# Altium PCB SuperBot_Pcb.PcbDoc
Units mm, origin at the board's own origin, x right, y up, seen from the top; angles counter-clockwise.
Board outline 80 x 92 mm, 2 copper layers (Top Layer, Bottom Layer); 130 components, 142 nets, 552 pads, 15 vias.
Unrouted connection lines stored in the file: 209.
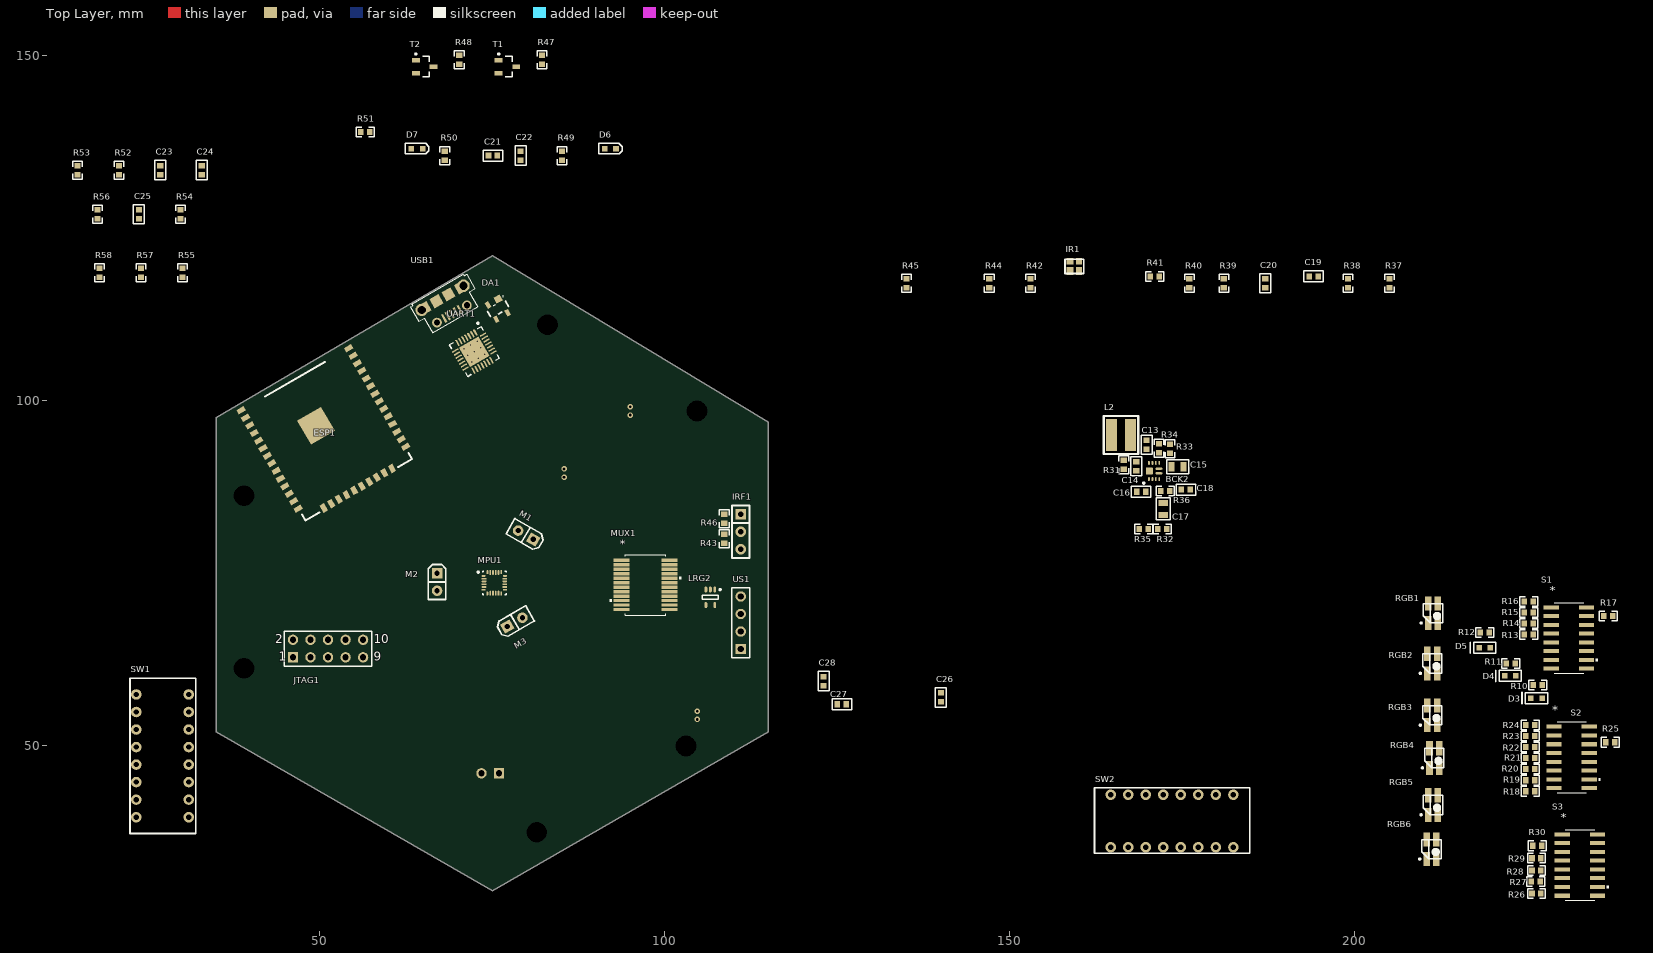
[diagram p0: Top Layer view]
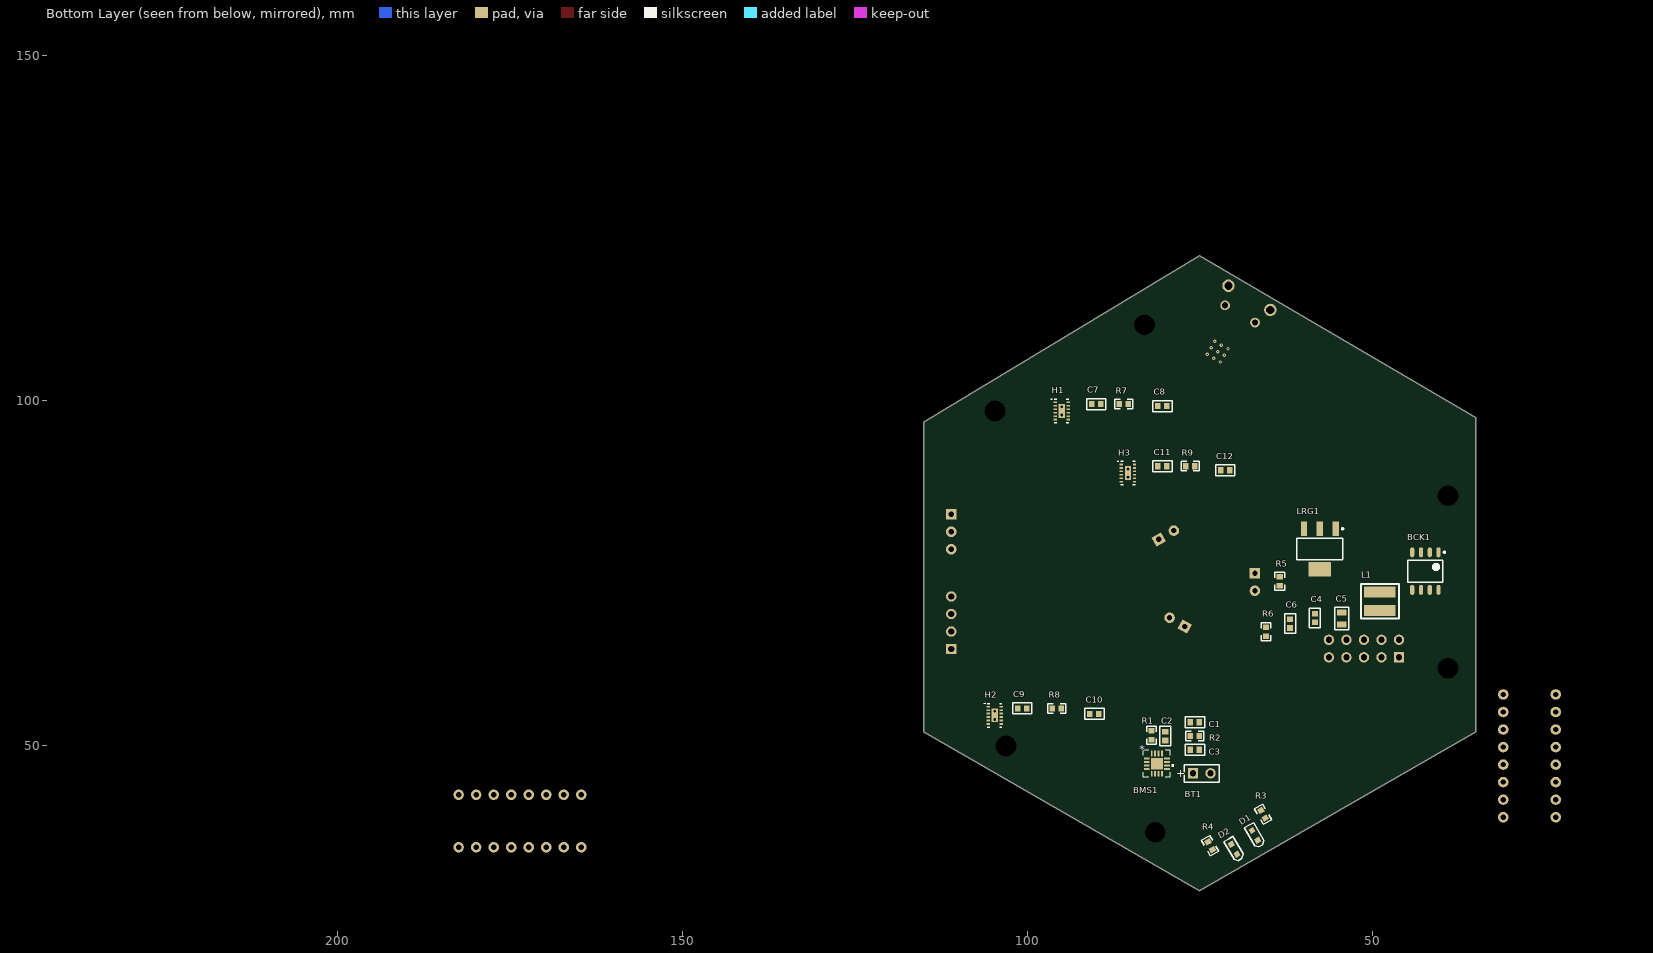
[diagram p1: Bottom Layer view, seen from below]

## Layer stack, top to bottom
Top Solder: solder mask 0.0102, Solder Resist, Dk 3.5
Top Layer: signal copper 0.0356
Dielectric 1: dielectric 0.32, FR-4, Dk 4.8
Bottom Layer: signal copper 0.0356
Bottom Solder: solder mask 0.0102, Solder Resist, Dk 3.5

## Board outline
35,52 35,97.5 75,121 115,96.875 115,52 75,29

## Design rules (kind name [scope] priority, off if disabled: settings)
Clearance [All] p1: gap=0.254
PolygonConnect [All] p1: connectstyle=Relief reliefconductorwidth=0.254 reliefentries=4 polygonreliefangle="90 Angle" airgapwidth=0.254
RoutingVias [All] p1: holewidth=0.711 width=1.27 viastyle="Through Hole" minholewidth=0.711 minwidth=1.27 maxholewidth=0.711 maxwidth=1.27
SolderMaskExpansion [All] p1: expansion=0.102
Width [All] p1: maxlimit=0.254 minlimit=0.254 preferedwidth=0.254
29 further rules are at their usual default settings.

## Classes and differential pairs
component class Batmngt: BMS1 BT1 C1 C2 C3 D1 D2 R1 R2 R3 R4
component class ControllerPower: BCK1 C4 C5 C6 L1 LRG1 R5 R6
component class MPU9250: C26 C27 C28 MPU1
component class Superbot_hbridge_mk3: B1 B2 B3 C7 C8 C9 C10 C11 C12 H1 H2 H3 M1 M2 M3 R7 R8 R9
component class Superbot_LEDS: D3 D4 D5 R10 R11 R12 R13 R14 R15 R16 R17 R18 R19 R20 R21 R22 R23 R24 R25 R26 R27 R28 R29 R30 RGB1 RGB2 RGB3 RGB4 RGB5 RGB6 S1 S2 S3
component class Superbot_motor_boost_mk2: BCK2 C13 C14 C15 C16 C17 C18 L2 R31 R32 R33 R34 R35 R36
component class SuperBot_Sensors: C19 C20 IR1 IRF1 LRG2 MUX1 R37 R38 R39 R40 R41 R42 R43 R44 R45 R46 US1
component class SuperBot_Sheet_main: C23 C24 C25 ESP1 JTAG1 R52 R53 R54 R55 R56 R57 R58 SW1 SW2
component class Superbot_USB: C21 C22 D6 D7 DA1 R47 R48 R49 R50 R51 T1 T2 UART1 USB1

## Components (designator, comment, footprint, x,y, rotation, side; value= is the part's Value field where it differs from the comment)
BCK1 "DC-DC Buck" SOP8_AP3435 42.3,75.3 r270 bottom
BCK2 "TPS61089" VQFN_RNR0011A_1mm 170.9,89.8 r90 top
BMS1 "*" RGT16_1P7X1P7 81.2,47.4 r180 bottom
BT1 "Battery" BAT-2 74.7,46 r180 bottom
C1 "4.7uF" CAP0603R 75.7,53.4 r180 bottom
C2 "4.7uF" CAP0603R 80,51.4 r270 bottom
C3 "4.7uF" CAP0603R 75.7,49.4 r0 bottom
C4 "10uF" CAP0603R 58.3,68.5 r270 bottom
C5 "22uF" CAP0805R 54.4,68.425 r270 bottom
C6 "4.7uF" CAP0603R 61.9,67.7 r270 bottom
C7 "0.1uF" CAP0603R 90,99.5 r180 bottom
C8 "0.1uF" CAP0603R 80.4,99.2 r180 bottom
C9 "0.1uF" CAP0603R 100.7,55.4 r180 bottom
C10 "0.1uF" CAP0603R 90.25,54.6 r180 bottom
C11 "0.1uF" CAP0603R 80.4,90.5 r180 bottom
C12 "0.1uF" CAP0603R 71.3,89.9 r180 bottom
C13 "0.1uF" CAP0603R 169.8,93.6 r90 top
C14 "0.1uF" CAP0603R 168.3,90.5 r90 top
C15 "22uF" CAP0805R 174.3,90.4 r0 top
C16 "2.2uF" CAP0603R 169,86.8 r180 top
C17 "22uF" CAP0805R 172.2,84.3 r270 top
C18 "4.7uF" CAP0603R 175.5,87.1 r0 top
C19 "1uF" CAP0603R 194,118 r0 top
C20 "1uF" CAP0603R 187,117 r90 top
C21 "4.7uF" CAP0603R 75.1,135.5 r0 top
C22 "0.1uF" CAP0603R 79.1,135.5 r90 top
C23 "10uF" CAP0603R 26.902,133.4 r90 top
C24 "0.1uF" CAP0603R 32.902,133.4 r90 top
C25 "0.1uF" CAP0603R 23.802,127 r90 top
C26 "10nF" CAP0603R 140,57 r90 top
C27 "0.1pF" CAP0603R 125.65,56 r180 top
C28 "0.1pF" CAP0603R 123,59.35 r90 top
D1 "RED" 0603_LED 67,37 r240 bottom
D2 "RED" 0603_LED 70,35 r240 bottom
D3 "RED" LED0603 226.3,56.9 r0 top
D4 "RED" LED0603 222.5,60.1 r0 top
D5 "RED" LED0603 218.8,64.2 r0 top
D6 "TX LED" 0603_LED 92.1,136.5 r0 top
D7 "RX LED" 0603_LED 64.1,136.5 r0 top
DA1 "SP0503BAHTG" SOT143_SP0503BAHT 75.8,113.3 r300 top
ESP1 "ESP-32-WROOM" ESP-32-WROOM 47.9,100.5 r30 top
H1 "H-Bridge" WSON_0.8mm_DSS0012A 95,98.5 r180 bottom
H2 "H-Bridge" WSON_0.8mm_DSS0012A 104.7,54.4 r180 bottom
H3 "H-Bridge" WSON_0.8mm_DSS0012A 85.4,89.5 r180 bottom
IR1 "VCNT2020" VCNT2020 154.9,116.4 r0 top
IRF1 "IR Range Finder" H3 112.27,81 r0 top
JTAG1 "" HDR2X5 46.12,62.8 r0 top
L1 "2.2uH" 744031004 48.9,70.95 r0 bottom
L2 "2.2uH" 744031004 166.1,95 r270 top
LRG1 "3.3V Reg" SOT223_AP2114 57.6,78.5 r270 bottom
LRG2 "MIC5375-78" TSOP5_MIC537X 106.6,71.5 r270 top
M1 "Motor" MICROMOTOR_TYPEA 100.575,116.441 r240 top
M2 "Motor" MICROMOTOR_TYPEA 25.534,73.73 r0 top
M3 "Motor" MICROMOTOR_TYPEA 99,32 r120 top
MPU1 "MPU-9250_9DOF" QFN424_MPU-9250 75.3,73.6 r0 top
MUX1 "*" DB24-M 97.2,73.3 r0 top
R1 "1.13K" RES0603R 82,51.5 r90 bottom
R2 "1.18" RES0603R 75.7,51.4 r0 bottom
R3 "1K" RES0603R 65.825,40.063 r60 bottom
R4 "1K" RES0603R 73.5,35.5 r60 bottom
R5 "510K" RES0603R 63.4,73.8 r270 bottom
R6 "32.5K" RES0603R 65.4,66.5 r270 bottom
R7 "100K" RES0603R 86,99.5 r180 bottom
R8 "100K" RES0603R 95.7,55.4 r180 bottom
R9 "100K" RES0603R 76.4,90.5 r180 bottom
R10 "200" RES0603R 226.5,58.8 r180 top
R11 "200" RES0603R 222.6,61.9 r180 top
R12 "200" RES0603R 218.8,66.4 r0 top
R13 "180" RES0603R 225.2,66.1 r0 top
R14 "180" RES0603R 225.2,67.7 r0 top
R15 "180" RES0603R 225.2,69.3 r0 top
R16 "180" RES0603R 225.2,70.9 r0 top
R17 "180" RES0603R 236.7,68.8 r0 top
R18 "180" RES0603R 225.4,43.4 r180 top
R19 "180" RES0603R 225.4,45 r0 top
R20 "180" RES0603R 225.4,46.6 r0 top
R21 "180" RES0603R 225.4,48.2 r0 top
R22 "180" RES0603R 225.4,49.8 r0 top
R23 "180" RES0603R 225.4,51.4 r0 top
R24 "180" RES0603R 225.4,53 r0 top
R25 "180" RES0603R 237,50.5 r180 top
R26 "180" RES0603R 226.3,28.6 r0 top
R27 "180" RES0603R 226.2,30.3 r0 top
R28 "180" RES0603R 226.3,31.9 r0 top
R29 "180" RES0603R 226.3,33.7 r0 top
R30 "180" RES0603R 226.4,35.5 r0 top
R31 "150K" RES0603R 166.5,90.7 r270 top
R32 "437.19K" RES0603R 172.1,81.4 r180 top
R33 "10K" RES0603R 173.2,93 r90 top
R34 "127K" RES0603R 171.6,93.1 r90 top
R35 "100K" RES0603R 169.4,81.4 r180 top
R36 "17.4K" RES0603R 172.5,86.9 r0 top
R37 "100K" RES0603R 205,117 r90 top
R38 "1000K" RES0603R 199,117 r90 top
R39 "1.7K" RES0603R 181,117 r90 top
R40 "250K" RES0603R 176,117 r90 top
R41 "3.3K" RES0603R 171,118 r0 top
R42 "24K" RES0603R 153,117 r90 top
R43 "1.7K" RES0603R 108.6,80 r270 top
R44 "13K" RES0603R 147,117 r90 top
R45 "220" RES0603R 135,117 r90 top
R46 "3.3K" RES0603R 108.6,82.9 r270 top
R47 "12K" RES0603R 82.2,149.4 r90 top
R48 "12K" RES0603R 70.2,149.4 r90 top
R49 "350" RES0603R 85.1,135.5 r90 top
R50 "1K" RES0603R 68.1,135.5 r90 top
R51 "350" RES0603R 56.6,138.9 r0 top
R52 "5K" RES0603R 20.902,133.4 r90 top
R53 "10K" RES0603R 14.902,133.4 r90 top
R54 "10K" RES0603R 29.802,127 r90 top
R55 "10K" RES0603R 30.102,118.5 r90 top
R56 "10K" RES0603R 17.802,127 r90 top
R57 "10K" RES0603R 24.102,118.5 r90 top
R58 "10K" RES0603R 18.102,118.5 r90 top
RGB1 "" "RGB LED" 211.3,69.2 r90 top
RGB2 "" "RGB LED" 211.2,61.9 r90 top
RGB3 "" "RGB LED" 211.2,54.4 r90 top
RGB4 "" "RGB LED" 211.5,48.2 r90 top
RGB5 "" "RGB LED" 211.3,41.4 r90 top
RGB6 "" "RGB LED" 211.1,35 r90 top
S1 "74HC595D" SOT109-1-M 231,65.6 r0 top
S2 "74HC595D" SOT109-1-M 231.4,48.3 r0 top
S3 "74HC595D" SOT109-1-M 232.6,32.7 r0 top
SW1 "*" "DIP SPDT 4P" 31.02,47.26 r90 top
SW2 "*" "DIP SPDT 4P" 174.76,42.9 r180 top
T1 "SS8050-G" SOT23-SS8050-G 77.2,148.4 r0 top
T2 "SS8050-G" SOT23-SS8050-G 65.2,148.4 r0 top
UART1 "CP2102N" QFN28_CP2102n 72.4,107.1 r300 top
US1 "Ultrasonic Sensor" HDR1X4 111,64 r90 top
USB1 "USb-Mirco" USB_micro_through 67.79,114.857 r210 top

## Footprints (in the part's own frame and the unit in brackets; to place one, negate y for a bottom-side part, rotate by r counter-clockwise, add the part's x,y. Pads: shape width x height; smd on the part's side, far side on the other; paste and mask are expansions set on the pad)
0603_LED [mm]
  rect 0.8x0.8 smd: A(-0.825,0) K(0.825,0)
  silkscreen extent -1.7,-0.76 1.7,0.76
744031004 [mm] "Wurth Inductor"
  rect 4.6x1.6 smd: 1(0,1.35) 2(0,-1.35)
  silkscreen extent -2.75,-2.5 2.75,2.5, body extent -1.9,-1.9 1.9,1.9, height 1.65
BAT-2 [mm] "Battery; 2 Leads"
  rect 1.5x1.5 hole 0.9: 1(-1.27,0)
  round 1.5 hole 0.9: 2(1.27,0)
  silkscreen extent -2.54,-1.27 2.54,1.27
CAP0603R [mm] "capacitor 0603 reflow soldering"
  rect 0.8x0.9 smd: 1(-0.65,0) 2(0.65,0)
  silkscreen extent -1.4,-0.8 1.4,0.8, body extent -0.8,-0.4 0.8,0.4, height 0.3
CAP0805R [mm] "capacitor 0805 reflow soldering"
  rect 0.85x1.4 smd: 1(-0.875,0) 2(0.875,0)
  silkscreen extent -1.6,-1 1.6,1, body extent -1,-0.63 1,0.62, height 0.78
DB24-M [mil]
  rect 93x19 smd paste+0 mask+0: 1(-137,140.75) 2(-137,115.16) 3(-137,89.57) 4(-137,63.98) 5(-137,38.39) 6(-137,12.8) 7(-137,-12.8) 8(-137,-38.39) 9(-137,-63.98) 10(-137,-89.57) 11(-137,-115.16) 12(-137,-140.75) 13(137,-140.75) 14(137,-115.16) 15(137,-89.57) 16(137,-63.98) 17(137,-38.39) 18(137,-12.8) 19(137,12.8) 20(137,38.39) 21(137,63.98) 22(137,89.57) 23(137,115.16) 24(137,140.75)
  silkscreen extent -204,-172 204,172, body extent 0,0 10,10, height 10
"DIP SPDT 4P" [mil] "Dip Switch SPDT 4 Position Through Hole Slide (Standard) Actuator 50mA 24VDC"
  round 60 hole 30: 1(-300,0) 2(-300,300) 3(-200,300) 4(-100,0) 5(-100,300) 6(0,300) 7(100,0) 8(100,300) 9(200,300) 10(300,0) 11(300,300) 12(400,300) ""(-200,0) ""(0,0) ""(200,0) ""(400,0)
  silkscreen extent -394,-39 492,335
ESP-32-WROOM [mm]
  rect 1.2x0.75 smd: 1(-9,3.01) 2(-9,1.74) 3(-9,0.47) 4(-9,-0.8) 5(-9,-2.07) 6(-9,-3.34) 7(-9,-4.61) 8(-9,-5.88) 9(-9,-7.15) 10(-9,-8.42) 11(-9,-9.69) 12(-9,-10.96) 13(-9,-12.23) 14(-9,-13.5) 25(9,-13.5) 26(9,-12.23) 27(9,-10.96) 28(9,-9.69) 29(9,-8.42) 30(9,-7.15) 31(9,-5.88) 32(9,-4.61) 33(9,-3.34) 34(9,-2.07) 35(9,-0.8) 36(9,0.47) 37(9,1.74) 38(9,3.01)
  rect 4x4 smd: 1(-0.711,-4.343)
  rect 0.75x1.2 smd: 15(-5.715,-15.24) 16(-4.445,-15.24) 17(-3.175,-15.24) 18(-1.905,-15.24) 19(-0.635,-15.24) 20(0.635,-15.24) 21(1.905,-15.24) 22(3.175,-15.24) 23(4.445,-15.24) 24(5.715,-15.24)
  silkscreen extent -8.9,-15.5 8.9,3, body extent -9.04,-15.03 9.04,10.51, height 3.04
H3 [mil] "Headers 0.1mil pitch"
  rect 60x60 hole 30: 1(-50,100)
  round 60 hole 30: 2(-50,0) 3(-50,-100)
  silkscreen extent -100,-150 0,150, body extent -100,-150 0,150, height 335
HDR1X4 [mm] "Connector; Header; 4 Position"
  rect 1.5x1.5 hole 0.9: 1(0,0)
  round 1.5 hole 0.9: 2(2.54,0) 3(5.08,0) 4(7.62,0)
  silkscreen extent -1.27,-1.27 8.89,1.27
HDR2X5 [mm] "Connector; Header; 5x2 Position"
  rect 1.5x1.5 hole 0.9: 1(0,0)
  round 1.5 hole 0.9: 2(0,2.54) 3(2.54,0) 4(2.54,2.54) 5(5.08,0) 6(5.08,2.54) 7(7.62,0) 8(7.62,2.54) 9(10.16,0) 10(10.16,2.54)
  silkscreen extent -1.27,-1.27 11.43,3.81
LED0603 [mm] "ROHM LED 0603 SML-D12x1 Series"
  rect 0.8x0.8 smd: A(-0.825,0) K(0.825,0)
  silkscreen extent -2.1,-0.8 1.6,0.8, body extent -0.8,-0.4 0.8,0.4, height 0.55
MICROMOTOR_TYPEA [mil]
  rect 60x60 hole 30: 1(1632.52,50)
  round 60 hole 30: 2(1632.52,-50)
  round 60 hole 118.11 unplated: 16(531.5,492.13) 17(531.5,-492.13)
  silkscreen extent 1583,-100 1683,100, body extent 0,-650 1683,610, height 591
QFN28_CP2102n [mm] "Medium 5mm"
  oval 1x0.25 smd: 1(-2.325,1.5) 2(-2.325,1) 3(-2.325,0.5) 4(-2.325,0) 5(-2.325,-0.5) 6(-2.325,-1) 7(-2.325,-1.5) 15(2.325,-1.5) 16(2.325,-1) 17(2.325,-0.5) 18(2.325,0) 19(2.325,0.5) 20(2.325,1) 21(2.325,1.5)
  oval 0.25x1 smd: 8(-1.5,-2.325) 9(-1,-2.325) 10(-0.5,-2.325) 11(0,-2.325) 12(0.5,-2.325) 13(1,-2.325) 14(1.5,-2.325) 22(1.5,2.325) 23(1,2.325) 24(0.5,2.325) 25(0,2.325) 26(-0.5,2.325) 27(-1,2.325) 28(-1.5,2.325)
  rect 3.25x3.25 smd: 29(0,0)
  silkscreen extent -3.42,-2.65 2.65,2.65, body extent -2.55,-2.55 2.55,2.55, height 0.8
QFN424_MPU-9250 [mm] "QFN, 24-Leads, Body 3.00x3.00mm, Pitch 0.40mm, Thermal Pad 1.70x1.54mm, IPC Medium Density"
  oval 0.6x0.25 smd: 1(-1.55,1) 6(-1.55,-1) 13(1.55,-1) 18(1.55,1)
  oval 0.7x0.25 smd: 2(-1.5,0.6) 3(-1.5,0.2) 4(-1.5,-0.2) 5(-1.5,-0.6) 14(1.5,-0.6) 15(1.5,-0.2) 16(1.5,0.2) 17(1.5,0.6)
  oval 0.25x0.6 smd: 7(-1,-1.55) 12(1,-1.55) 19(1,1.55) 24(-1,1.55)
  oval 0.25x0.7 smd: 8(-0.6,-1.5) 9(-0.2,-1.5) 10(0.2,-1.5) 11(0.6,-1.5) 20(0.6,1.5) 21(0.2,1.5) 22(-0.2,1.5) 23(-0.6,1.5)
  silkscreen extent -2.47,-1.7 1.7,1.7, body extent -1.6,-1.6 1.6,1.6, height 1.05
RES0603R [mm] "resistor 0603 reflow soldering"
  rect 0.8x0.9 smd: 1(-0.65,0) 2(0.65,0)
  silkscreen extent -1.3,-0.7 1.3,0.7, body extent -0.8,-0.4 0.8,0.4, height 0.45
"RGB LED" [mm] "Leaded Chip Carrier, 6-Leads, Body 3.55x2.80mm, Pitch 1.400mm, IPC Low Density"
  rect 2.05x0.95 smd: 1(-1.425,0.7) 2(-1.425,-0.7) 3(1.425,-0.7) 4(1.425,0.7)
  silkscreen extent -1.55,-1.4 1.4,1.85, body extent -1.7,-1.5 1.7,1.5, height 2.1
RGT16_1P7X1P7 [mm]
  rect 0.85x0.28 smd paste-0.14 mask+0: 1(-1.475,0.75) 2(-1.475,0.25) 3(-1.475,-0.25) 4(-1.475,-0.75) 9(1.475,-0.75) 10(1.475,-0.25) 11(1.475,0.25) 12(1.475,0.75)
  rect 0.28x0.85 smd paste-0.14 mask+0: 5(-0.75,-1.475) 6(-0.25,-1.475) 7(0.25,-1.475) 8(0.75,-1.475) 13(0.75,1.475) 14(0.25,1.475) 15(-0.25,1.475) 16(-0.75,1.475)
  rect 1.7x1.7 smd paste-0.837 mask-0.838: 17(0,0)
  silkscreen extent -1.96,-1.96 2.41,1.96, body extent 0,0 0.25,0.25, height 0.25
SOP8_AP3435 [mm] "SOP, 8-Leads, Body 4.90x3.90mm, Pitch 1.27mm, IPC Medium Density"
  oval 1.45x0.6 smd: 1(-2.725,1.905) 2(-2.725,0.635) 3(-2.725,-0.635) 4(-2.725,-1.905) 5(2.725,-1.905) 6(2.725,-0.635) 7(2.725,0.635) 8(2.725,1.905)
  silkscreen extent -2.85,-2.55 1.6,2.88, body extent -3,-2.55 3,2.55, height 1.75
SOT23-SS8050-G [mm] "SOT23, 3-Leads, Body 2.90x2.40mm, Pitch 0.95mm, IPC Low Density"
  rect 1.15x0.65 smd: 1(-1.275,0.95) 2(-1.275,-0.95) 3(1.275,0)
  silkscreen extent -1.4,-1.5 0.7,1.95, body extent -1.28,-1.5 1.28,1.5, height 1.15
SOT109-1-M [mil]
  rect 87x23 smd paste+0 mask+0: 1(-100.5,175) 2(-100.5,125) 3(-100.5,75) 4(-100.5,25) 5(-100.5,-25) 6(-100.5,-75) 7(-100.5,-125) 8(-100.5,-175) 9(100.5,-175) 10(100.5,-125) 11(100.5,-75) 12(100.5,-25) 13(100.5,25) 14(100.5,75) 15(100.5,125) 16(100.5,175)
  silkscreen extent -84,-202 164,202, body extent 0,0 10,10, height 10
SOT143_SP0503BAHT [mm] "SOT143, 4-Leads, Body 2.92x2.37mm, Pitch 1.90mm, IPC Medium Density"
  rect 1x1 smd: 1(-1.2,0.75)
  rect 1x0.6 smd: 2(-1.2,-0.95) 3(1.2,-0.95) 4(1.2,0.95)
  silkscreen extent -1.25,-1.5 0.7,1.6, body extent -0.85,-1.52 0.85,1.52, height 1.2
SOT223_AP2114 [mm] "SOT223, 4-Leads, Body 6.50x7.00mm (avg), Pitch 2.30mm, IPC Medium Density"
  rect 2.15x0.9 smd: 1(-2.925,2.3) 2(-2.925,0) 3(-2.925,-2.3)
  rect 2.15x3.2 smd: 4(2.925,0)
  silkscreen extent -3.05,-3.35 1.55,3.42, body extent -3.5,-3.35 3.5,3.35, height 1.8
TSOP5_MIC537X [mm] "TSOP, 6-Leads, Body 2.03x1.25mm, Pitch 0.65mm, IPC Medium Density"
  oval 0.85x0.4 smd: 1(-1.125,0.65) 2(-1.125,0) 3(-1.125,-0.65) 4(1.125,-0.65) 5(1.125,0.65)
  silkscreen extent -1.25,-1.15 0.3,1.53, body extent -1.01,-1.15 1.01,1.15, height 1.1
USB_micro_through [mm]
  rect 0.33x1.35 smd: 1(-1.325,2.65) 2(-0.675,2.65) 3(-0.025,2.65) 4(0.625,2.65) 5(1.275,2.65)
  round 1.8 hole 1.2: 6(-3.525,-0.025) 6(3.475,-0.025)
  rect 1.5x1.55 smd: 6(-3.075,-0.025) 6(-1.025,-0.025) 6(0.975,-0.025) 6(3.025,-0.025)
  round 1.408 hole 0.9: 6(-2.525,2.675) 6(2.475,2.675)
  silkscreen extent -4.72,-1.47 4.67,3.63, body extent -4.04,-2.69 4.01,2.89, height 2.74
VCNT2020 [mm]
  rect 0.97x0.95 smd: 1(3.81,3.81)
  rect 0.85x1.15 smd: 2(5.1,2.4)
  rect 0.85x0.95 smd: 3(5.1,3.8)
  rect 0.97x1.15 smd: 4(3.8,2.4)
  silkscreen extent 3.1,2 5.8,4.1, body extent 3.05,2.05 5.65,4.15, height 0.8
VQFN_RNR0011A_1mm [mm] "QFN, 12-Leads, Body 2.50x2.00mm, Pitch 0.70mm/0.50mm, IPC Medium Density"
  oval 0.55x0.25 smd: 1(-1.175,0.75) 2(-1.175,0.25) 3(-1.175,-0.25) 4(-1.175,-0.75) 7(1.175,-0.75) 8(1.175,-0.25) 9(1.175,0.25) 10(1.175,0.75)
  oval 0.35x1 smd: 5(-0.35,-0.7) 6(0.35,-0.7)
  rrect10% 1x1 smd: 11(0,0.7)
  silkscreen extent -1.87,1.37 -1.63,1.62, body extent -1.3,-1.05 1.3,1.05, height 1
WSON_0.8mm_DSS0012A [mm] "SON, 12-Leads, Body 3.00x2.00mm, Pitch 0.50mm, Thermal Pad 2.00x0.79mm, IPC Medium Density"
  rect 0.5x0.25 smd: 1(-0.95,1.25) 2(-0.95,0.75) 3(-0.95,0.25) 4(-0.95,-0.25) 5(-0.95,-0.75) 6(-0.95,-1.25) 7(0.95,-1.25) 8(0.95,-0.75) 9(0.95,-0.25) 10(0.95,0.25) 11(0.95,0.75) 12(0.95,1.25)
  rect 0.9x2 smd: 13(0,0)
  silkscreen extent -1.5,-1.7 1.05,1.75, body extent -1.13,-1.55 1.13,1.55, height 0.8

## Part data
BCK1: "AP3435, 1.0MHz, 3.5A, Synchronous Step Down DC-DC Converter"
BCK2: "Boost Switching Regulator IC Positive Adjustable 4.5V 1 Output 7A 11-VFQFN"
BMS1: library part BQ24079RGTR, "Imported"
BT1: "Multicell Battery"
C1 C2 C3 C4 C5 C6 C7 C8 C9 C10 C11 C12 C13 C14 C15 C16 C17 C18 C19 C20 C21 C22 C23 C24 C25 C26 C27 C28: library part C, "Capacitor"
D1 D2 D3 D4 D5 D6 D7: library part LED, "LED"
DA1: "TVS DIODE 5.5VWM 8.5VC SOT143"
ESP1: "ESP-32-WROOM, WIFI + BT"
H1 H2 H3: library part DRV8839DSSR, "1.8A , Half Bridge (2), Driver - Fully Integrated, Control and Power Stage"
IR1: "Reflective Optical Sensor with Transistor Output"
IRF1: library part IR-Range-Finder, "Sharp IR GP2Y0A21YK0F"
JTAG1: library part "Header 5X2", "Header, 5-Pin, Dual row"
L1 L2: library part L, "Inductor"
LRG1: library part "Reg 3.3V", "AP2114H-3.3TRG1"
LRG2: library part MIC5378YC5, "Linear Voltage Regulator IC Positive Adjustable 1 Output 1.5 V ~ 4.5 V 150mA SC-70-5"
MPU1: library part MPU-9250, "IMU ACCEL/GYRO/MAG I2C/SPI 24QFN"
MUX1: library part CD74HC4067SM96, "Imported"
R1 R2 R3 R4 R5 R6 R7 R8 R9 R10 R11 R12 R13 R14 R15 R16 R17 R18 R19 R20 R21 R22 R23 R24 R25 R26 R27 R28 R29 R30 R31 R32 R33 R34 R35 R36 R37 R38 R39 R40 R41 R42 R43 R44 R45 R46 R47 R48 R49 R50 R51 R52 R53 R54 R55 R56 R57 R58: library part R, "Resistor"
RGB1 RGB2 RGB3 RGB4 RGB5 RGB6: library part "RGB LED", "Red, Green, Blue (RGB) 622nm Red, 528nm Green, 468nm Blue LED Indication - Discrete 2V Red, 3.1V Green, 3.1V Blue 4-PLCC"
S1 S2 S3: "Shift Register"
SW1 SW2: library part "DIP SPDT 4P"
T1 T2: library part "NPN Transistor"
UART1: "336-3694-ND / , IC BRIDGE USB TO UART 28QFN"
US1: library part "Header 4", "Header, 4-Pin"
USB1: "USb-Mirco, CONN RCPT MCR USB B SMD TH SHLL"

## Via types
v1: diameter 0.5, hole 0.2, Top Layer to Bottom Layer, 9 vias
v2: diameter 0.8, hole 0.4, Top Layer to Bottom Layer, 6 vias

## Nets (pads, with @x,y where several pads share a name; then routed paths per layer and width w, separated by ;. In a path a pad name is that pad's centre, name@x,y a point inside that pad or via, vN(x,y) a via of type N, cw(c..) or ccw(c..) an arc to the next point about the centre after c; other vN are vias at no path point)
BMS_EN1: BMS1.6 SW2.4
BMS_EN2: BMS1.5 SW2.1
CH_0.5: SW2.6 UART1.15
CH_1.5: SW2.3 UART1.14
CS: ESP1.19 MPU1.22
EN: ESP1.3 SW2.9 SW2.10 T1.3
ESP_CTS: ESP1.31 R48.1 T1.2 UART1.24
ESP_RTS: ESP1.36 UART1.23
ESP_RX: ESP1.34 UART1.26
ESP_TX: ESP1.35 UART1.25
GND: BCK1.3 BCK1.6 BCK2.5 BMS1.1 BMS1.4 BMS1.8 BMS1.14 BMS1.15 BMS1.17 BT1.2 C1.2 C2.1 C3.1 C4.1 C5.2 C6.2 C7.2 C8.2 C9.2 C10.2 C11.2 C12.2 C13.2 C15.2 C16.2 C17.2 C18.2 C19.2 C20.1 C21.2 C22.2 C23.1 C24.1 C25.2 C26.2 C27.2 C28.2 DA1.1 ESP1.1 ESP1.15 ESP1.38 H1.5 H1.6 H1.13 H2.5 H2.6 H2.13 H3.5 H3.6 H3.13 IR1.4 IRF1.2 JTAG1.3 JTAG1.5 JTAG1.9 LRG1.2 LRG2.2 MPU1.18 MPU1.20 MUX1.12 MUX1.15 R1.2 R2.1 R5.2 R34.2 R35.2 R40.1 R41.1 R42.2 R46.1 R53.2 R55.2 R56.2 R57.2 R58.2 S1.8 S1.13 S2.8 S2.13 S3.8 S3.13 UART1.3 US1.4 USB1.5 USB1.6
  other v2: 104.7,53.8 104.7,55 85.4,88.9 85.4,90.1 95,97.9 95,99.1
IO0: ESP1.25 R52.1 T2.3
IRDS_OUT: MUX1.7 R43.1 R46.2
IRDS_SGNL: IRF1.3 R43.2
M1_EN: H1.7 H1.9 SW1.10
M1_IN1: ESP1.6 H1.10
M1_IN2: ESP1.7 H1.8
M2_EN: H2.7 H2.9 SW1.7
M2_IN1: ESP1.8 H2.10
M2_IN2: ESP1.9 H2.8
M3_EN: H3.7 H3.9 SW1.4
M3_IN1: ESP1.10 H3.10
M3_IN2: ESP1.11 H3.8
MISO: ESP1.21 MPU1.9
MOSI: ESP1.22 MPU1.24
MTCK: ESP1.16 JTAG1.4
MTDI: ESP1.14 JTAG1.8
MTDO: ESP1.23 JTAG1.6
MTMS: ESP1.13 JTAG1.2
MUX_IO: ESP1.4 MUX1.1
MUX_S0: MUX1.10
MUX_S1: ESP1.5 MUX1.11
MUX_S2: ESP1.12 MUX1.14
MUX_S3: ESP1.17 MUX1.13
MUX_S4: ESP1.18
NetBCK1_4: BCK1.4 R5.1 R6.1
NetBCK1_7: BCK1.7 L1.1
NetBCK2_1: BCK2.1 R31.2
NetBCK2_2: BCK2.2 C16.1
NetBCK2_3: BCK2.3 R32.2 R35.1
NetBCK2_4: BCK2.4 C17.1 R36.1
NetBCK2_7: BCK2.7 R33.1
NetBCK2_8: BCK2.8 R34.1
NetBCK2_10: BCK2.10 C14.2
NetBCK2_11: BCK2.11 C14.1 L2.2 R31.1
NetBMS1_2: BMS1.2 BMS1.3 BT1.1 C3.2
NetBMS1_7: BMS1.7 D2.K
NetBMS1_9: BMS1.9 D1.K
NetBMS1_12: BMS1.12 R2.2
NetBMS1_16: BMS1.16 R1.1
NetC18_1: C18.1 R36.2
NetC27_1: C27.1 MPU1.10
NetD1_A: D1.A R3.1
NetD2_A: D2.A R4.1
NetD3_K: D3.K R10.2
NetD4_K: D4.K R11.2
NetD5_K: D5.K R12.2
NetD6_A: D6.A R49.1
NetD6_K: D6.K UART1.19
NetD7_A: D7.A R51.1
NetD7_K: D7.K UART1.18
NetESP1_28: ESP1.28 SW1.6
NetESP1_29: ESP1.29 SW1.9
NetESP1_30: ESP1.30 SW1.12
NetH1_4: H1.4 M1.1
NetH1_11: H1.11 R7.1
NetH2_4: H2.4 M2.1
NetH2_11: H2.11 R8.1
NetH3_4: H3.4 M3.1
NetH3_11: H3.11 R9.1
NetIR1_1: IR1.1 R44.1
NetIR1_3: IR1.3 R45.1
NetLRG2_3: LRG2.3 R37.2
NetLRG2_4: LRG2.4 R38.1 R40.2
NetR10_1: R10.1 S1.7
NetR11_1: R11.1 S1.6
NetR12_1: R12.1 S1.5
NetR13_1: R13.1 RGB1.2
NetR13_2: R13.2 S1.4
NetR14_1: R14.1 RGB1.3
NetR14_2: R14.2 S1.3
NetR15_1: R15.1 RGB1.4
NetR15_2: R15.2 S1.2
NetR16_1: R16.1 RGB2.2
NetR16_2: R16.2 S1.1
NetR17_1: R17.1 RGB2.3
NetR17_2: R17.2 S1.15
NetR18_1: R18.1 S2.7
NetR18_2: R18.2 RGB2.4
NetR19_1: R19.1 RGB3.2
NetR19_2: R19.2 S2.6
NetR20_1: R20.1 RGB3.3
NetR20_2: R20.2 S2.5
NetR21_1: R21.1 RGB3.4
NetR21_2: R21.2 S2.4
NetR22_1: R22.1 RGB4.2
NetR22_2: R22.2 S2.3
NetR23_1: R23.1 RGB4.3
NetR23_2: R23.2 S2.2
NetR24_1: R24.1 RGB4.4
NetR24_2: R24.2 S2.1
NetR25_1: R25.1 RGB5.2
NetR25_2: R25.2 S2.15
NetR26_1: R26.1 RGB5.3
NetR26_2: R26.2 S3.7
NetR27_1: R27.1 RGB5.4
NetR27_2: R27.2 S3.6
NetR28_1: R28.1 RGB6.2
NetR28_2: R28.2 S3.5
NetR29_1: R29.1 RGB6.3
NetR29_2: R29.2 S3.4
NetR30_1: R30.1 RGB6.4
NetR30_2: R30.2 S3.3
NetR39_2: R39.2 US1.3
NetR47_1: R47.1 T2.2 UART1.28
NetR47_2: R47.2 T1.1
NetR48_2: R48.2 T2.1
NetR50_1: R50.1 UART1.9
NetR53_1: R53.1 SW1.5 SW1.8 SW1.11
NetR54_1: R54.1 SW2.12
NetR55_1: R55.1 R56.1 SW2.11
NetR57_1: R57.1 SW2.5
NetR58_1: R58.1 SW2.2
NetS1_9: S1.9 S2.14
NetS2_9: S2.9 S3.14
OS_LED: MUX1.8 R45.2
OS_SENSE: MUX1.9 R42.1 R44.2
SCK: ESP1.20 MPU1.23
SR_CLK: S1.11 S2.11 S3.11
SR_D: S1.14
SR_LATCH: S1.12 S2.12 S3.12
TRST: JTAG1.10 SW2.7
US_OUT: MUX1.5 R39.1 R41.2
US_TRIG: MUX1.6 US1.2
USB_DN: DA1.4 UART1.5 USB1.2
USB_DP: DA1.3 UART1.4 USB1.3
V_3.3: C6.1 C8.1 C10.1 C12.1 C21.1 C22.1 C23.2 C24.2 C25.1 C26.1 C28.1 ESP1.2 H1.12 H2.12 H3.12 JTAG1.1 LRG1.3 LRG1.4 MPU1.1 MPU1.8 MPU1.13 MUX1.24 R7.2 R8.2 R9.2 R52.2 R54.2 UART1.6 UART1.7
V_3.4_Buck: C5.1 L1.2 LRG1.1 R6.2
V_5: C20.2 LRG2.5 R38.2 US1.1
V_5.5: BCK1.1 BCK1.8 BCK2.9 BMS1.10 BMS1.11 C1.1 C4.2 C13.1 C19.1 D3.A D4.A D5.A IR1.2 IRF1.1 L2.1 LRG2.1 R3.2 R4.2 R33.2 R37.1 R49.2 R51.2 RGB1.1 RGB2.1 RGB3.1 RGB4.1 RGB5.1 RGB6.1 S1.10 S1.16 S2.10 S2.16 S3.10 S3.16
V_6.5: BCK2.6 C7.1 C9.1 C11.1 C15.1 H1.1 H1.2 H2.1 H2.2 H3.1 H3.2 R32.1
V_USB: BMS1.13 C2.2 DA1.2 R50.2 UART1.8 USB1.1
pads on no net: BCK1.2 BCK1.5 ESP1.24 ESP1.26 ESP1.27 ESP1.32 ESP1.33 ESP1.37 H1.3 H2.3 H3.3 JTAG1.7 M1.2 M1.16 M1.17 M2.2 M2.16 M2.17 M3.2 M3.16 M3.17 MPU1.2 MPU1.3 MPU1.4 MPU1.5 MPU1.6 MPU1.7 MPU1.11 MPU1.12 MPU1.14 MPU1.15 MPU1.16 MPU1.17 MPU1.19 MPU1.21 MUX1.2 MUX1.3 MUX1.4 MUX1.16 MUX1.17 MUX1.18 MUX1.19 MUX1.20 MUX1.21 MUX1.22 MUX1.23 S3.1 S3.2 S3.9 S3.15 SW1. SW1.1 SW1.2 SW1.3 SW2. SW2.8 UART1.1 UART1.2 UART1.10 UART1.11 UART1.12 UART1.13 UART1.16 UART1.17 UART1.20 UART1.21 UART1.22 UART1.27 UART1.29 USB1.4
copper on no net:
  other v1: 71.997,105.597 72.95,106.147 71.447,106.55 73.903,106.697 72.4,107.1 70.897,107.503 73.353,107.65 71.85,108.053 72.803,108.603

## Keep-outs
Keep-Out Layer:
  text "Put C17 R36 C18 on opp side with a via? So R35, R32, V_6.5 better access?" at 180.6,84 h1.52

## Text inside footprints (layer, text, board x,y; h text height)
BT1: Bottom Overlay "+" at 78.37,45.423 h1.15
JTAG1: Top Overlay "2" at 43.58,64.832 h1.27; Top Overlay "1" at 44.088,62.292 h1.27; Top Overlay "9" at 57.804,62.292 h1.27; Top Overlay "10" at 57.804,64.832 h1.27
S1: Top Overlay "*" at 228.193,71.772 h1.27; Mechanical 13 "*" at 229.387,70.528 h1.27
S2: Top Overlay "*" at 228.593,54.472 h1.27; Mechanical 13 "*" at 229.787,53.228 h1.27
S3: Top Overlay "*" at 229.793,38.872 h1.27; Mechanical 13 "*" at 230.987,37.628 h1.27